# Altium PCB reciever.PcbDoc
Units mm, origin at the board's own origin, x right, y up, seen from the top; angles counter-clockwise.
Board outline 152.4 x 101.6 mm, 2 copper layers (Top Layer, Bottom Layer); 25 components, 22 nets, 127 pads, 21 vias.
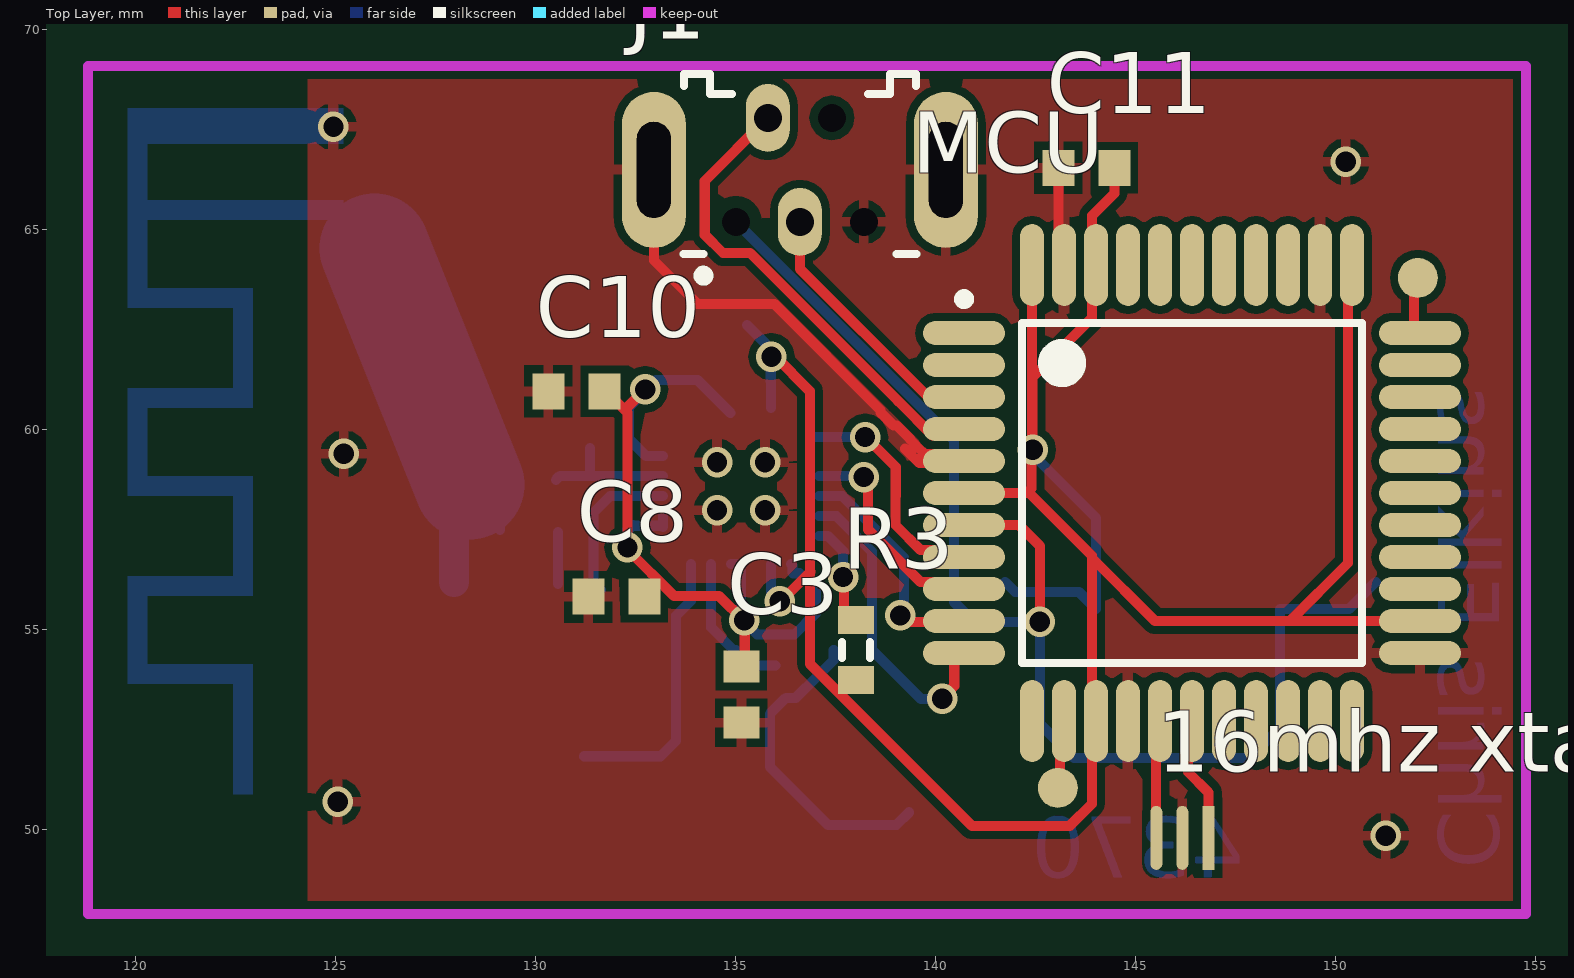
[diagram p0: Top Layer view]
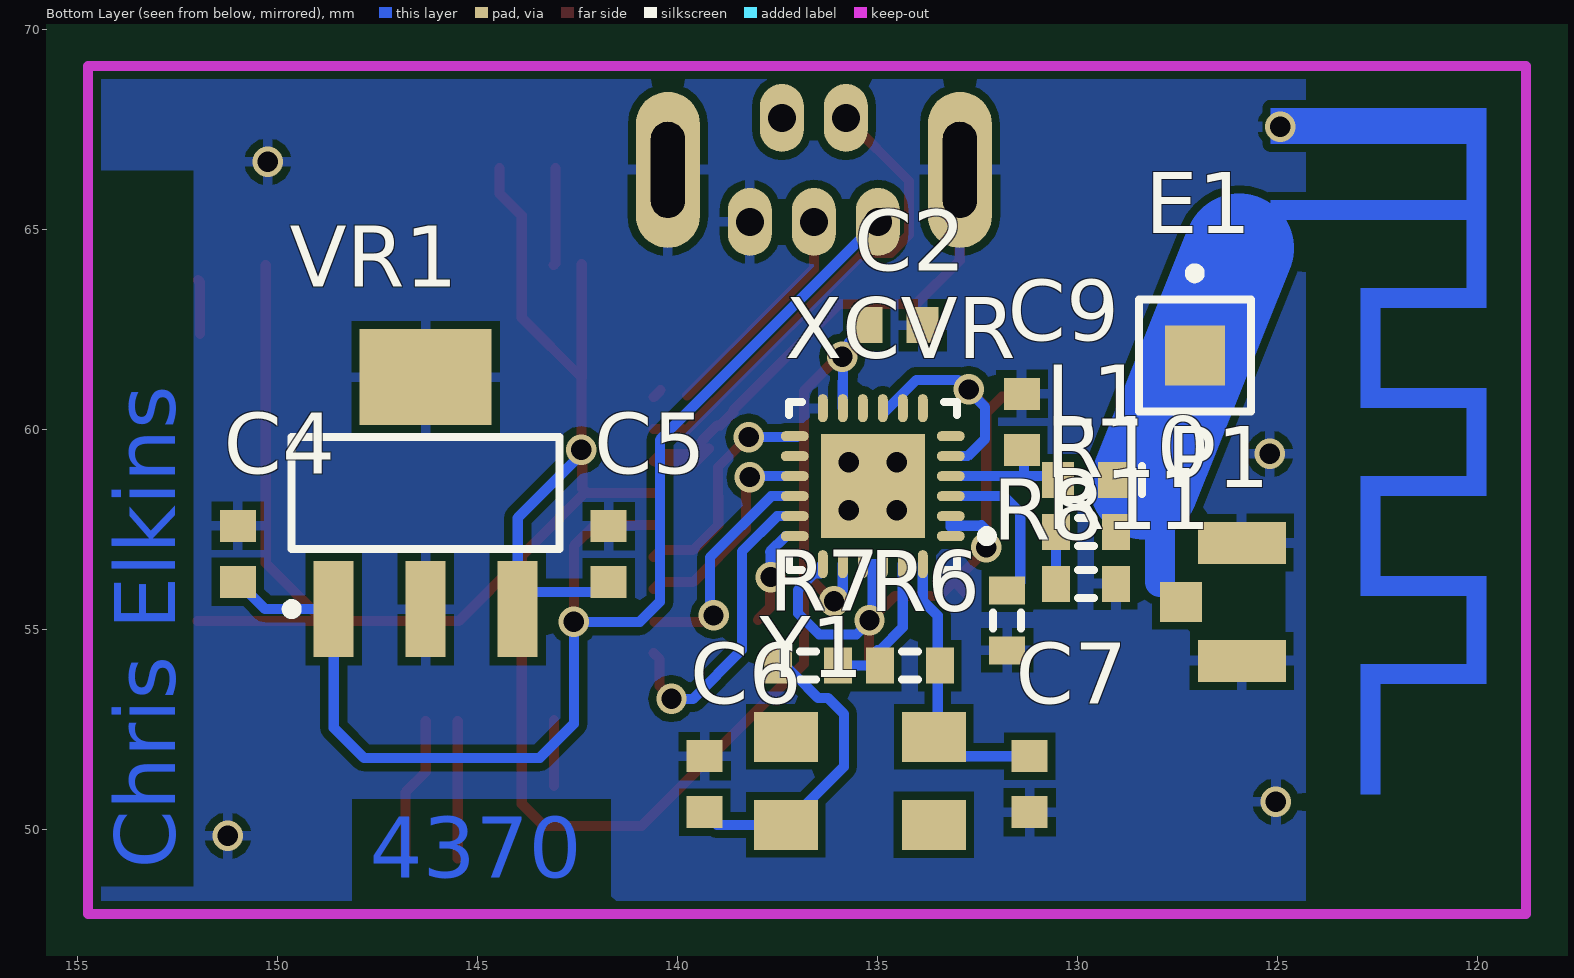
[diagram p1: Bottom Layer view, seen from below]

## Layer stack, top to bottom
Top Layer: signal copper 0.0356
Dielectric: dielectric 0.32, FR-4, Dk 4.8
Bottom Layer: signal copper 0.0356

## Board outline
25.4,25.4 177.8,25.4 177.8,127 25.4,127

## Design rules (kind name [scope] priority, off if disabled: settings)
Clearance [All] p1: gap=0.2
PolygonConnect [All] p1: connectstyle=Relief reliefconductorwidth=0.254 reliefentries=4 polygonreliefangle="90 Angle"
RoomDefinition U_xcvr [InComponentClass('U_xcvr')] p1: confinementstyle=ConfineOut formatcopy=TRUE lockcomponents=FALSE outline 177.93,77.75 264.269,77.75 264.269,85.46 177.93,85.46
RoomDefinition U_power [InComponentClass('U_power')] p2: confinementstyle=ConfineOut formatcopy=TRUE lockcomponents=FALSE outline 222.22,55.57 239.93,55.57 239.93,65.67 222.22,65.67
RoomDefinition U_mcu [InComponentClass('U_mcu')] p3: confinementstyle=ConfineOut formatcopy=TRUE lockcomponents=FALSE outline 222.01,37.22 257.34,37.22 257.34,54.53 222.01,54.53
RoomDefinition U_connectors [InComponentClass('U_connectors')] p4: confinementstyle=ConfineOut formatcopy=TRUE lockcomponents=FALSE outline 226.07,23.15 231.73,23.15 231.73,35.06 226.07,35.06
RoutingVias [All] p1: holewidth=0.711 width=1.27 viastyle="Through Hole" minholewidth=0.711 minwidth=1.27 maxholewidth=0.711 maxwidth=1.27
SilkscreenOverComponentPads [All] p1: minsilkscreentomaskgap=0.254
SolderMaskExpansion [All] p1: expansion=0.102
Width [All] p1: maxlimit=5 minlimit=0.254 preferedwidth=0.254
27 further rules are at their usual default settings.

## Classes and differential pairs
component class U_xcvr: C2 C3 C6 C7 C8 C9 C10 E1 L1 P1 R3 R6 R7 R8 R10 R11 XCVR Y1
component class U_power: C4 C5 VR1
component class U_mcu: "16mhz xtal" C11 MCU
component class U_connectors: J1

## Components (designator, comment, footprint, x,y, rotation, side; value= is the part's Value field where it differs from the comment)
"16mhz xtal" "NCSTCE16M0V53-R0" OSC 146.812,49.8 r180 top
C2 "Cap Semi" CAPC1608L 134.58,62.62 r0 bottom
C3 "Cap Semi" CAPC1608L 135.14,53.38 r90 top
C4 "Cap Semi" CAPC1608L 151,56.9 r270 bottom
C5 "Cap Semi" CAPC1608L 141.732,56.896 r270 bottom
C6 "Cap Semi" CAPC1608L 139.332,51.142 r270 bottom
C7 "Cap Semi" CAPC1608L 131.204,51.142 r90 bottom
C8 "Cap Semi" CAPC1608L 132.012,55.83 r0 top
C9 "Cap Semi" CAPC1608L 131.4,60.2 r90 bottom
C10 "Cap Semi" CAPC1608L 131.01,60.96 r180 top
C11 "Cap Semi" CAPC1608L 143.764,66.548 r180 top
E1 "Antenna" PIN1 127.078,61.865 r180 bottom
J1 "5000750517" 5000750517 136.6,66.5 r0 top
L1 "Inductor" INDC1608L 129.8,58.75 r0 bottom
MCU "ATMega32u4" TQFP44_M 146.404,58.42 r0 top
P1 "u.fl" "U.FL connector" 125.9,55.7 r270 bottom
R3 "Res3" RESC1608L 138,54.5 r270 top
R6 "Res3" RESC1608L 134.202,54.108 r180 bottom
R7 "Res3" RESC1608L 136.742,54.108 r180 bottom
R8 "Res3" RESC1608L 131.77,55.24 r90 bottom
R10 "Res3" RESC1608L 129.8,57.45 r180 bottom
R11 "Res3" RESC1608L 129.8,56.15 r180 bottom
VR1 "NCP1117ST33T3G" SOT223-4N 146.304,58.42 r90 bottom
XCVR "CYRF8935" QFN50P400X400-24VAL 135.128,58.594 r0 bottom
Y1 "XTAL" PCBComponent_1 137.3,50.126 r180 bottom

## Footprints (in the part's own frame and the unit in brackets; to place one, negate y for a bottom-side part, rotate by r counter-clockwise, add the part's x,y. Pads: shape width x height; smd on the part's side, far side on the other; paste and mask are expansions set on the pad)
5000750517 [mm] "Connector; USB Mini-B, Type 2, Thru-Hole; 5 Position; Vertical"
  round 0.4 / inner round 0.4 / far side oval 1.1x1.7 hole 0.7: 1(-1.6,-1.3) 4(0.8,1.3) 5(1.6,-1.3)
  oval 1.1x1.7 / inner round 0.4 / far side oval 1.1x1.7 hole 0.7: 2(-0.8,1.3) 3(0,-1.3)
  oval 1.6x3.9 / inner oval 0.55x2.1 / far side oval 1.6x3.9 hole 0.85 slot 2.4 at 90 deg: 6(3.65,0) 7(-3.65,0)
  silkscreen extent -2.91,-2.77 2.91,2.4, body extent -3.85,-2.1 3.85,2.4, height 7.7
CAPC1608L [mm] "Chip Capacitor, Body 1.6x0.8mm, IPC High Density"
  rect 0.8x0.9 smd: 1(-0.7,0) 2(0.7,0)
  body extent -0.87,-0.48 0.87,0.48, height 1.3
INDC1608L [mm] "Chip Inductor, Body 1.6x0.8mm, IPC High Density"
  rect 0.8x0.9 smd: 1(-0.7,0) 2(0.7,0)
  silkscreen extent -1.4,-0.35 -1.4,0.35, body extent -0.87,-0.48 0.87,0.48, height 0.55
OSC [mm]
  rect 0.3x1.6 smd: 1(0,0)
  oval 0.3x1.6 smd: 2(0.65,0) 3(1.3,0)
PCBComponent_1 [mm]
  rect 1.6x1.25 smd: 1(0,0) 2(3.7,2.2) 3(0,2.2) 3(3.7,0)
PIN1 [mm] "Generic Antenna; 1 Lead"
  rect 1.5x1.5 smd: 1(0,0)
  silkscreen extent -1.4,-1.4 1.4,2.17
QFN50P400X400-24VAL [mm] "24-Pin Plastic Quad Flat No-Lead 0.5 mm Pitch"
  oval 0.7x0.25 smd: 1(-1.95,1.25) 2(-1.95,0.75) 3(-1.95,0.25) 4(-1.95,-0.25) 5(-1.95,-0.75) 6(-1.95,-1.25) 13(1.95,-1.25) 14(1.95,-0.75) 15(1.95,-0.25) 16(1.95,0.25) 17(1.95,0.75) 18(1.95,1.25)
  oval 0.25x0.7 smd: 7(-1.25,-1.95) 8(-0.75,-1.95) 9(-0.25,-1.95) 10(0.25,-1.95) 11(0.75,-1.95) 12(1.25,-1.95) 19(1.25,1.95) 20(0.75,1.95) 21(0.25,1.95) 22(-0.25,1.95) 23(-0.75,1.95) 24(-1.25,1.95)
  rect 2.6x2.6 smd: 25(0,0)
  silkscreen extent -2.97,-2.1 2.1,2.1, body extent -2.07,-2.07 2.07,2.07, height 1
RESC1608L [mm] "Chip Resistor, Body 1.6x0.8mm, IPC High Density"
  rect 0.7x0.9 smd: 1(-0.75,0) 2(0.75,0)
  silkscreen extent -0.2,-0.35 0.2,0.35, body extent -0.85,-0.48 0.85,0.48, height 0.9
SOT223-4N [mm] "SOT223, 4-Leads, Body 6.5x3.5mm, Pitch 2.3mm, Lead Span 7mm, IPC Medium Density"
  rect 2.4x1 smd: 1(-2.9,2.3) 2(-2.9,0) 3(-2.9,-2.3)
  rect 2.4x3.3 smd: 4(2.9,0)
  silkscreen extent -3.02,-3.35 1.4,3.48, body extent -1.85,-3.35 1.85,3.35, height 1.7
TQFP44_M [mm] "Thin QFP, 44-Leads, Body 10x10mm, Pitch 0.8mm, IPC Low Density"
  oval 2.05x0.6 smd: 1(-5.7,4) 2(-5.7,3.2) 3(-5.7,2.4) 4(-5.7,1.6) 5(-5.7,0.8) 6(-5.7,0) 7(-5.7,-0.8) 8(-5.7,-1.6) 9(-5.7,-2.4) 10(-5.7,-3.2) 11(-5.7,-4) 23(5.7,-4) 24(5.7,-3.2) 25(5.7,-2.4) 26(5.7,-1.6) 27(5.7,-0.8) 28(5.7,0) 29(5.7,0.8) 30(5.7,1.6) 31(5.7,2.4) 32(5.7,3.2) 33(5.7,4)
  oval 0.6x2.05 smd: 12(-4,-5.7) 13(-3.2,-5.7) 14(-2.4,-5.7) 15(-1.6,-5.7) 16(-0.8,-5.7) 17(0,-5.7) 18(0.8,-5.7) 19(1.6,-5.7) 20(2.4,-5.7) 21(3.2,-5.7) 22(4,-5.7) 34(4,5.7) 35(3.2,5.7) 36(2.4,5.7) 37(1.6,5.7) 38(0.8,5.7) 39(0,5.7) 40(-0.8,5.7) 41(-1.6,5.7) 42(-2.4,5.7) 43(-3.2,5.7) 44(-4,5.7)
  silkscreen extent -5.82,-4.25 4.25,4.97, body extent -5,-5 5,5, height 1.6
"U.FL connector" [mm] "u.fl smd connector"
  rect 1x1.05 smd: 1(0,-1.525)
  rect 1.05x2.2 smd: 2(-1.475,0) 2(1.475,0)

## Part data
C2 C3 C4 C5 C6 C7 C8 C9 C10 C11: "Capacitor (Semiconductor SIM Model)"
E1: "Generic Antenna"
J1: "USB On-The-Go (OTG) Mini-B Receptacle, Right Angle, Thru-Hole, 0.80mm (.031\") Pitch, Solder Tails & Shell Tabs with Dimples"
MCU: "usb enabled avr microcontroller"
P1: library part BNC, "BNC Elbow Connector"
R3 R6 R7 R8 R10 R11: "Resistor"
VR1: library part "Volt Reg", "Voltage Regulator"
Y1: "Crystal Oscillator"

## Free pads (board coordinates)
  round 1 smd: 1(143.05,51.05) 1(152.05,63.8)

## Via types
v1: diameter 0.762, hole 0.508, Top Layer to Bottom Layer, 17 vias
v2: diameter 0.762, hole 0.508, Top Layer to Bottom Layer, tented top, 4 vias

## Nets (pads, with @x,y where several pads share a name; then routed paths per layer and width w, separated by ;. In a path a pad name is that pad's centre, name@x,y a point inside that pad or via, vN(x,y) a via of type N, cw(c..) or ccw(c..) an arc to the next point about the centre after c; other vN are vias at no path point)
GND: "16mhz xtal.2" C2.1 C3.1 C4.1 C5.1 C6.1 C7.1 C8.1 C9.2 C10.2 C11.2 J1.5 J1.6 J1.7 MCU.5 MCU.15 MCU.23 MCU.35 MCU.43 P1.2 R8.1 R11.2 VR1.2 VR1.4 XCVR.12 XCVR.25 | length 16.3
  Top Layer w0.254: J1.7@132.96,66.61 132.954,66.604 132.954,64.236 134.04,63.15 135.96,63.15 138.613,60.497 138.613,60.439 138.938,60.113 139.017,60.113 139.352,59.778 139.352,59.76 139.912,59.2 MCU.5@140.54,59.2 ; 139.23,59.53 139.59,59.17 MCU.5@139.86,59.17 ; 139.719,59.393 140.431,59.393 MCU.5@140.604,59.22 ; C11.2 143.064,64.16 MCU.43@143.104,64.12
  other v1: 151.25,49.85 125.05,50.7 125.2,59.4 150.25,66.7 124.94,67.58
  other v2: 134.528,57.994 135.728,57.994 134.528,59.194 135.728,59.194
"Net16mhz xtal_1": "16mhz xtal.1" MCU.17 | length 3.7
  Top Layer w0.254: MCU.17@146.304,52.72 146.304,51.446 146.812,50.938 146.812,49.276
"Net16mhz xtal_3": "16mhz xtal.3" MCU.16 | length 3.4
  Top Layer w0.254: 145.504,49.284 MCU.16@145.504,52.72
NetC6_2: C6.2 R7.1 Y1.1 | length 7.9
  Bottom Layer w0.254: R7.1@137.448,54.498 137.448,54.248 137.049,53.849 136.5,53.3 136.25,53.3 135.85,52.9 135.85,51.576 Y1.1 139.016,50.126 C6.2
NetC7_2: C7.2 R6.2 XCVR.24 Y1.2 | length 7
  Bottom Layer w0.254: C7.2 133.116,51.842 133.502,52.228 133.502,54.498 133.502,55.352 133.878,55.728 XCVR.24
NetC9_1: C9.1 L1.2 XCVR.4 | length 3.3
  Bottom Layer w0.254: L1.2 130.6,58.85 XCVR.4@133.172,58.85 ; 131.35,58.948 C9.1@131.35,59.55
NetE1_1: E1.1 L1.1 P1.1 R10.2 | length 9.8
  Bottom Layer w0.254: R10.2@129.1,57.5 L1.1
  Bottom Layer w0.754: 127.95,56.2 127.95,58.4
  Bottom Layer w2.743: 125.968,64.539 128.34,58.63
NetJ1_2: J1.2 MCU.4 | length 12.1
  Top Layer w0.254: J1.2 134.223,66.223 134.223,64.878 134.678,64.423 135.357,64.423 139.059,60.721 139.059,60.711 ; 139.09,60.69 MCU.4@139.923,59.857 ; MCU.4@139.892,59.878 MCU.4@139.892,60.02 ; MCU.4@139.943,60.02 MCU.4@140.604,60.02
NetJ1_3: J1.3 MCU.3 | length 6
  Top Layer w0.254: J1.3@136.6,65.3 136.6,64.03 MCU.3@139.77,60.86 ; MCU.3@140.431,60.993 MCU.3@140.604,60.82
NetMCU_8: MCU.8 XCVR.13 | length 5.7
  Top Layer w0.254: v1@138.235,59.835 138.996,59.074 138.996,58.354 138.99,58.348 138.99,57.622 139.619,56.993 140.431,56.993 MCU.8@140.604,56.82
  Bottom Layer w0.254: XCVR.13@137.02,59.82 v1(138.23,59.82)
NetMCU_9: MCU.9 XCVR.15 | length 5.4
  Top Layer w0.254: v1@138.3,58.75 138.3,57.512 139.619,56.193 140.431,56.193 MCU.9@140.604,56.02
  Bottom Layer w0.254: XCVR.15 138.206,58.844 v1@138.3,58.75
  other v1: 138.2,58.82
NetMCU_10: MCU.10 XCVR.16 | length 6.6
  Top Layer w0.254: v1(139.108,55.362) 139.042,55.362 139.042,55.19 139.19,55.19 139.2,55.2 MCU.10@140.584,55.2
  Bottom Layer w0.254: XCVR.16 137.666,58.344 139.2,56.81 139.2,55.2 139.19,55.19 139.042,55.19 139.042,55.362 v1(139.108,55.362)
NetMCU_11: MCU.11 XCVR.17 | length 7.7
  Top Layer w0.254: v1@140.13,53.27 140.46,53.6 140.46,54.276 MCU.11@140.604,54.42
  Bottom Layer w0.254: XCVR.17 137.516,57.844 138.4,56.96 138.4,54.5 139.63,53.27 v1@140.1,53.27
  other v1: 140.16,53.28
NetR3_1: R3.1 XCVR.18 | length 2.6
  Top Layer w0.254: v1@137.7,56.31 137.7,55.55 R3.1
  Bottom Layer w0.254: XCVR.18 137.306,57.344 137.7,56.95 137.68,56.93 v1(137.68,56.32)
NetR6_1: R6.1 R7.2 XCVR.23 | length 3.5
  Bottom Layer w0.254: XCVR.23 134.378,55.062 134.942,54.498 R6.1@135.002,54.498 ; R6.1 R7.2
NetR8_2: R8.2 XCVR.3 | length 3.9
  Bottom Layer w0.254: R8.2@131.63,56 131.44,56.19 131.44,57.93 131.854,58.344 XCVR.3
NetR10_1: R10.1 R11.1 | length 1.3
  Bottom Layer w0.254: R11.1 R10.1
NewNet1: MCU.13 pad.1@143.05,51.05 | length 1.7
  Top Layer w0.254: pad.1@143.1,51.1 MCU.13@143.1,52.75
NewNet2: MCU.33 pad.1@152.05,63.8 | length 1.4
  Top Layer w0.254: MCU.33@151.95,62.4 151.95,63.7 pad.1@152,63.75
VCC: C2.2 C5.2 C11.1 MCU.6 MCU.14 MCU.24 MCU.34 MCU.42 MCU.44 R3.2 VR1.3 XCVR.11 XCVR.20 | length 69.9
  Top Layer w0.254: v1@135.89,61.85 135.97,61.85 136.85,60.97 136.85,54.15 140.9,50.1 143.35,50.1 143.904,50.654 143.904,56.856 142.34,58.42 142.27,58.42 ; v1(136.097,55.713) 136.097,55.82 136.18,55.82 136.29,55.71 136.04,55.71 136.12,55.71 136.865,56.455 ; MCU.6@140.604,58.42 142.27,58.42 ; 142.404,61.31 MCU.44@142.404,64.14 ; 143.904,56.796 145.48,55.22 148.85,55.22 ; C11.1 144.464,65.914 143.904,65.354 143.904,62.804 142.41,61.31 142.41,59.606 142.304,59.5 142.39,59.414 142.39,58.54 142.27,58.42 ; MCU.34@150.304,64.12 150.304,56.674 148.85,55.22 ; MCU.24@152.004,55.22 148.85,55.22
  Bottom Layer w0.254: C2.2 v1@135.75,62.15 ; 135.87,61.22 v1@135.87,61.68 ; XCVR.20 135.878,55.872 136.04,55.71 136.29,55.71 136.18,55.82 136.097,55.82 v1(136.097,55.713) ; XCVR.11 135.878,61.212 ; C5.2 141.978,55.95 143.574,55.95 VR1.3 144.004,57.8 142.304,59.5 v1(142.42,59.5)
  other v1: 135.89,61.83
VDD: C3.2 C8.2 C10.1 XCVR.1 XCVR.2 XCVR.5 XCVR.8 XCVR.9 XCVR.19 XCVR.21 XCVR.22 | length 22.2
  Top Layer w0.254: C10.1@131.89,60.83 132.29,60.43 132.29,57.01 133.45,55.85 134.57,55.85 135.22,55.22 C3.2@135.22,54.06 ; 132.26,60.54 v1(132.73,61.01) ; C8.2 C8.2@133.091,56.209
  Bottom Layer w0.254: 133.15,57.6 133.178,57.572 XCVR.2 ; XCVR.5 132.756,59.344 132.32,59.78 132.32,60.57 133,61.25 134.036,61.25 XCVR.9@134.868,60.418 ; XCVR.22 135.13,56.644 ; 135.13,56.65 135.13,56.644 ; 135.15,56.65 135.144,56.644 135.13,56.644 ; v1@135.21,55.18 135.13,55.26 135.13,56.644 ; v1@135.27,55.24 135.27,55.15 135.535,54.885 136.466,54.885 136.998,55.417 136.998,56.001 136.972,56.027 136.972,56.029 136.583,56.418 136.433,56.418 136.417,56.434 136.417,56.605 XCVR.19
  Bottom Layer w0.264: v1(132.29,57.06) 132.29,57.49 132.42,57.62 ; 132.4,57.6 133.15,57.6
  other v1: 135.21,55.24
VUSB: C4.2 J1.1 MCU.7 VR1.1 | length 33.1
  Top Layer w0.254: MCU.7@140.604,57.62 142.08,57.62 142.6,57.1 v1(142.6,55.2)
  Bottom Layer w0.254: J1.1 140.45,59.75 140.45,55.7 140.95,55.2 v1(142.6,55.2) 142.6,52.65 143.45,51.8 147.85,51.8 148.604,52.554 VR1.1 150.32,55.52 C4.2
pads on no net: J1.4 MCU.1 MCU.2 MCU.12 MCU.18 MCU.19 MCU.20 MCU.21 MCU.22 MCU.25 MCU.26 MCU.27 MCU.28 MCU.29 MCU.30 MCU.31 MCU.32 MCU.36 MCU.37 MCU.38 MCU.39 MCU.40 MCU.41 XCVR.6 XCVR.7 XCVR.10 XCVR.14 Y1.3

## Polygon pours and split planes (outlines as drawn)
GND on Top Layer "Top Layer-No Net" (solid, remove dead copper, pour order 1000): 156.84,46.21 155.3,47.75 155.3,70.27 118.8,70.27 117.41,68.88 118.29,68 118.29,47.04
GND on Bottom Layer "Top Layer-No Net" (solid, remove dead copper, pour order 1001): 155.69,70.29 155.69,47.21 154.57,46.09 154.51,46.03 116.44,46.03 116.44,69.67 117,70.23

## Keep-outs
Keep-Out Layer:
  lines w0.254: 118.8,47.9 118.8,69.1 154.75,69.1 154.75,47.9 118.8,47.9

## Other copper
Bottom Layer:
  region net NetE1_1: 122.43,53.87 122.43,50.89 122.93,50.89 122.93,53.87
  region net NetE1_1: 120.06,54.15 120.06,53.65 122.93,53.65 122.93,54.15
  region net NetE1_1: 120.08,65.75 120.08,65.25 125.19,65.25 125.19,65.75
  region net NetE1_1: 120.22,68.05 120.22,67.15 125.19,67.15 125.19,68.05
  region net NetE1_1: 119.79,68.05 119.79,63.05 120.29,63.05 120.29,68.05
  region net NetE1_1: 120.1,63.55 120.1,63.05 122.93,63.05 122.93,63.55
  region net NetE1_1: 122.43,63.32 122.43,60.82 122.93,60.82 122.93,63.32
  region net NetE1_1: 122.43,58.55 122.43,56.15 122.93,56.15 122.93,58.55
  region net NetE1_1: 120.14,56.35 120.14,55.85 122.93,55.85 122.93,56.35
  region net NetE1_1: 119.96,61.05 119.96,60.55 122.93,60.55 122.93,61.05
  region net NetE1_1: 120.07,58.85 120.07,58.35 122.93,58.35 122.93,58.85
  region net NetE1_1: 119.79,61.05 119.79,58.35 120.29,58.35 120.29,61.05
  region net NetE1_1: 119.79,56.35 119.79,53.65 120.29,53.65 120.29,56.35
  pour cut-out: 124.8,54.2 124.8,57.2 127,57.2 127,54.2
  text "Chris Elkins" at 152.56,49.03 h1.52 r270
  text "4370" at 147.7,48.8 h1.52
Multi-Layer:
  pour cut-out: 124.3,68.95 124.3,47.9 118.8,47.9 118.8,68.95

## Silkscreen, mask and mechanical layers (free items; w line width, h text height)
Top Solder:
  circle w0.254: c152.05,65.4 r0.05
  circle w0.254: c152.05,65.4 r0.25
  circle w0.254: c152.05,65.4 r0.5
  circle w0.254: c143.05,49.05 r0.05
  circle w0.254: c143.05,49.05 r0.255
  circle w0.254: c143.05,49.05 r0.5